# Altium PCB F407Z.PcbDoc (part 2 of 3)
Units mil, origin at the board's own origin, x right, y up, seen from the top; angles counter-clockwise.
Board outline 4724.41 x 3937.01 mil, 2 copper layers (Top Layer, Bottom Layer), stack 61.855 mil thick; 103 components, 137 nets, 547 pads, 2347 vias.
Unrouted connection lines stored in the file: 2.
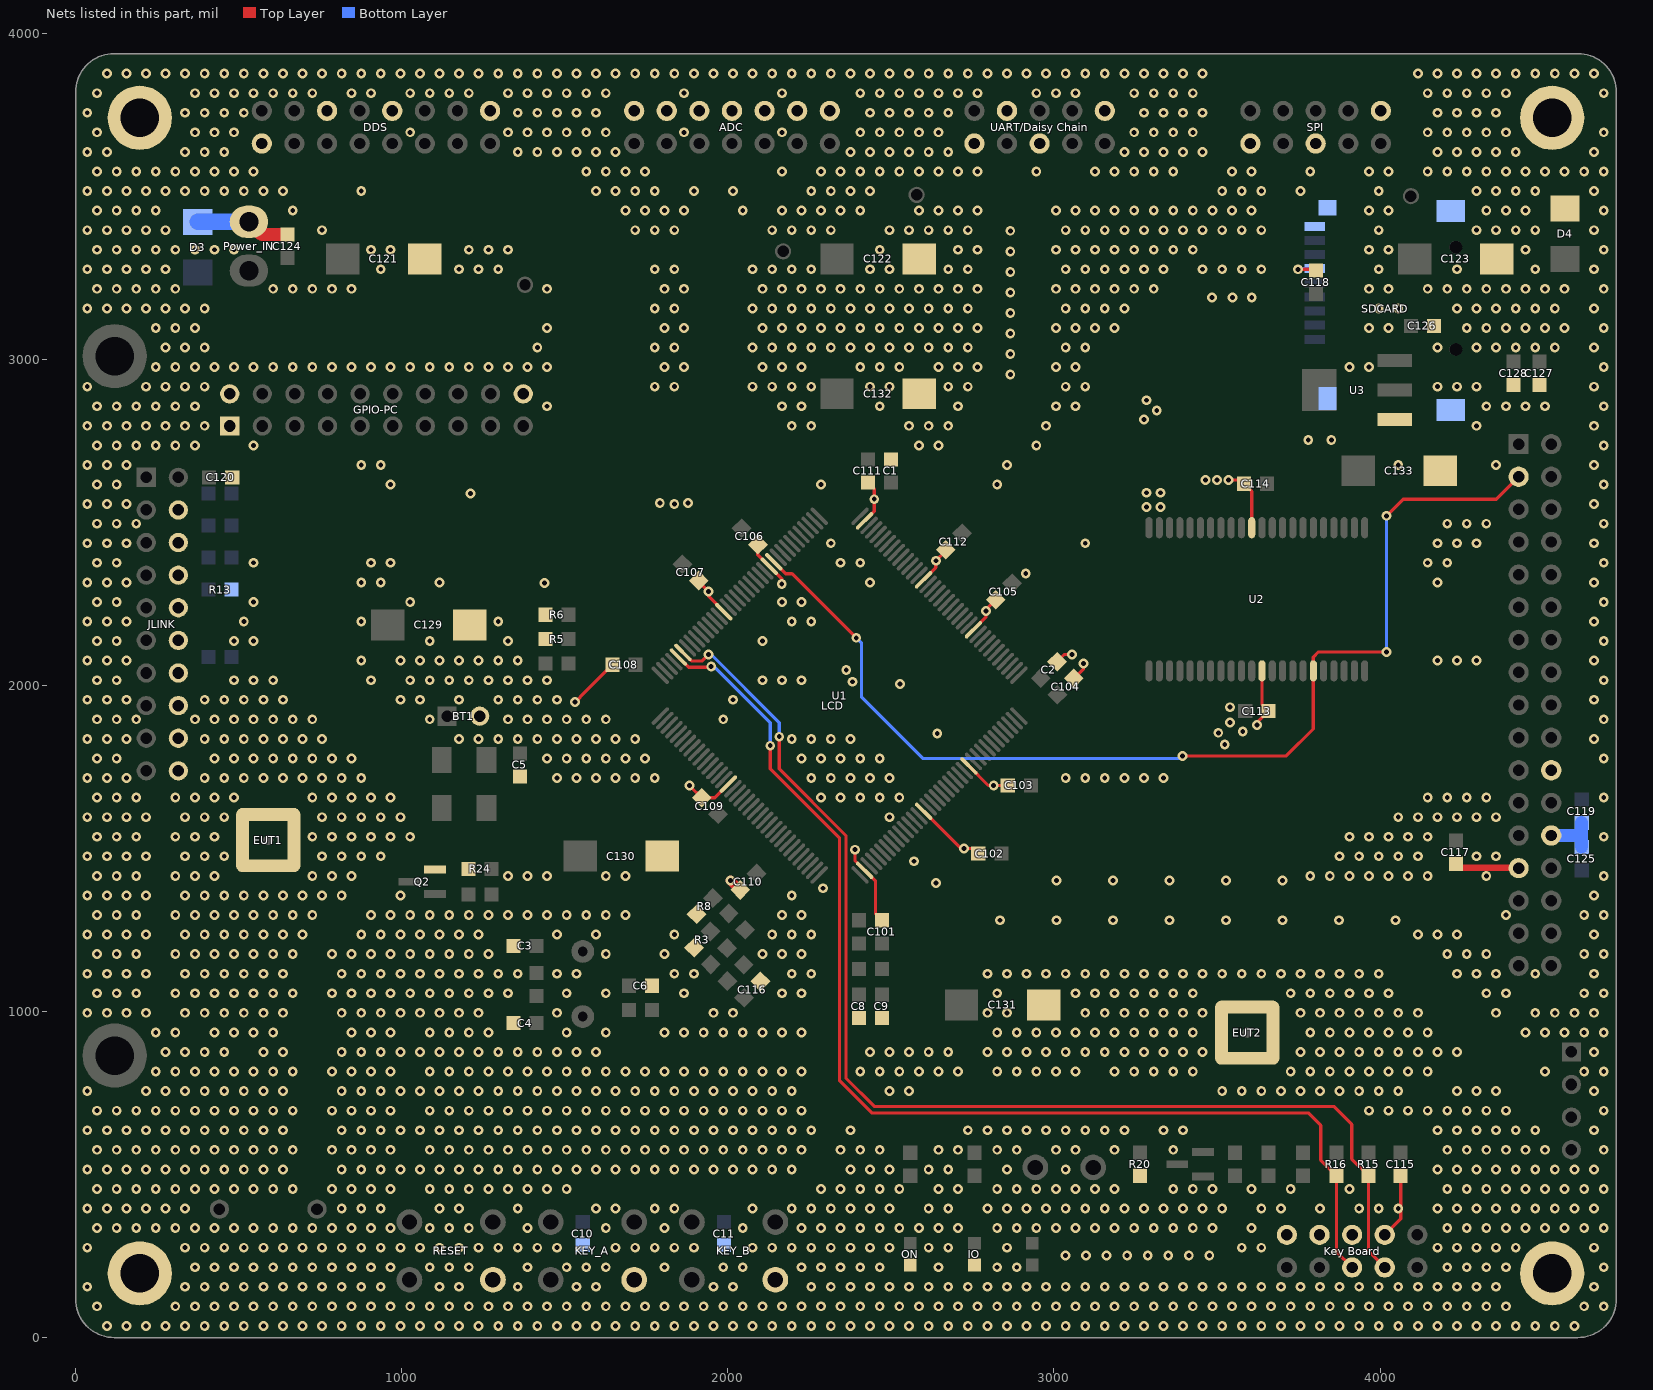
[diagram p2: the nets of this part, all layers, seen from the top]

## Via types
v1: diameter 30, hole 15, Top Layer to Bottom Layer, tented both sides, 2344 vias
v2: diameter 30, hole 15, Top Layer to Bottom Layer, 3 vias

## Nets (pads, with @x,y where several pads share a name; then routed paths per layer and width w, separated by ;. In a path a pad name is that pad's centre, name@x,y a point inside that pad or via, vN(x,y) a via of type N, cw(c..) or ccw(c..) an arc to the next point about the centre after c; other vN are vias at no path point) (continued)
FSMC_NWE: LCD.3 U1.119 U2.17 | length 3352.4
  Top Layer w10: U1.119@2140.69,2379.13 2177.3,2342.52 2196.85,2342.52 v1(2393.7,2145.67) ; v1(3393.7,1783.46) 3712.6,1783.46 3795.28,1866.14 3795.28,2023.62 U2.17@3799.21,2027.56 ; U2.17@3795.28,2044.29 3795.28,2086.61 3811.02,2102.36 v1(4019.69,2102.36) ; v1(4019.69,2519.68) 4070.87,2570.87 4355.94,2570.87 LCD.3@4424.69,2639.61
  Bottom Layer w10: v1(2393.7,2145.67) 2410,2129.37 2410,1963.02 2597.18,1775.84 3357.02,1775.84 3357.27,1775.59 3393.7,1775.59 v1(3393.7,1783.46) ; v1(4019.69,2102.36) v1(4019.69,2519.68)
GND: "Key Board.3" "Key Board.5" "Key Board.7" "Key Board.9" "UART/Daisy Chain.1" "UART/Daisy Chain.4" "UART/Daisy Chain.5" "UART/Daisy Chain.10" ADC.2 ADC.4 ADC.6 ADC.8 ADC.10 ADC.12 ADC.14 BT1.2 C1.1 C2.1 C3.2 C4.2 C5.2 C6.2 C8.1 C9.1 C10.2 C11.2 C101.1 C102.1 C103.1 C104.1 C105.1 C106.1 C107.1 C108.1 C109.1 C110.1 C111.1 C112.1 C113.1 C114.1 C115.1 C116.1 C117.1 C118.1 C119.1 C120.1 C121.2 C122.2 C123.2 C124.1 C125.1 C126.1 C127.1 C128.1 C129.2 C130.2 C131.2 C132.2 C133.2 D3.1 D4.1 DDS.1 DDS.6 DDS.10 DDS.16 EUT1.2 EUT2.2 GPIO-PC.1 GPIO-PC.2 GPIO-PC.20 IO.2 JLINK.4 JLINK.6 JLINK.8 JLINK.10 JLINK.12 JLINK.14 JLINK.16 JLINK.18 JLINK.20 KEY_A.2 KEY_B.2 LCD.22 LCD.26 LCD.27 ON.2 pad.0 pad.1 pad.2 pad.3 Power_IN.2 Q2.2 R3.1 R5.1 R6.2 R8.2 R13.1 R20.1 R24.1 RESET.2 SDCARD.6 SDCARD.9 SDCARD.10 SDCARD.11 SDCARD.12 SDCARD.13 SPI.1 SPI.5 SPI.10 U1.16 U1.38 U1.51 U1.61 U1.83 U1.94 U1.107 U1.120 U1.130 U2.12 U2.34 U3.1 | length 3082.3
  Top Layer w10: v1(1531.5,1948.82) 1562.99,1980.31 C108.1@1645.67,2062.99 ; v1(1881.89,1692.91) C109.1@1919.83,1654.98 1959.39,1654.98 U1.16@2001.49,1697.08 ; C107.1@1910.88,2321.4 1910.88,2317.46 v1(1940.94,2287.4) 1940.94,2272.64 U1.130@1987.57,2226.01 ; C106.1@2091.98,2431.64 2091.98,2399.99 U1.120@2126.77,2365.21 2165.35,2326.62 v1(2165.35,2311.02) ; v1(2389.76,1496.06) 2389.76,1461.92 U1.38@2419.08,1432.61 2452.76,1398.93 2452.76,1299.21 C101.1@2472.44,1279.53 ; U1.107@2419.08,2504.4 2448.82,2534.14 2448.82,2602.36 C111.1@2429.13,2622.05 ; U1.51@2600.03,1613.56 2713.59,1500 v1(2724.41,1500) 2751.97,1500 C102.1@2767.72,1484.25 ; U1.94@2600.03,2323.45 2637.8,2361.22 v1(2637.8,2381.89) 2667.86,2411.95 C112.1@2667.86,2415.89 ; U1.61@2739.22,1752.75 2799.06,1692.91 v1(2814.96,1692.91) C103.1@2858.27,1692.91 ; U1.83@2753.14,2170.34 2791.34,2208.53 v1(2791.34,2228.35) 2791.34,2232.28 C105.1@2821.4,2262.35 ; C2.1@3009.31,2072.3 3031.5,2094.49 v1(3055.12,2094.49) ; C104.1@3060.49,2021.12 3090.55,2051.18 v1(3090.55,2066.93) ; v1(3535.43,2629.92) 3570.87,2629.92 C114.1@3582.68,2618.11 3606.3,2594.49 U2.34@3606.3,2483.27 ; v1(3622.05,1877.95) 3622.05,1885.83 C113.1@3657.48,1921.26 3637.8,1940.94 U2.12@3637.8,2044.29 ; v1(3748.03,3275.59) 3795.28,3275.59 C118.1@3803.15,3267.72 ; 4014.17,314.96 4062.99,363.78 C115.1@4062.99,496.06 ; C117.1@4248.03,1448.82 4255.91,1440.94
  Top Layer w20: 4255.91,1440.94 4423.35,1440.94 LCD.27@4424.69,1439.61
  Top Layer w30: v1(2007.87,1401.57) 2036.87,1372.58 C110.1@2037.94,1372.58
  Top Layer w40: Power_IN.2@531.5,3421.46 571.06,3381.89 C124.1@649.61,3381.89
  Bottom Layer w10: v1(3748.03,3275.59) 3751.97,3275.59 3753.94,3277.56 SDCARD.6@3798.9,3277.56
  Bottom Layer w40: LCD.26@4524.69,1539.61 4613.94,1539.61 4618.11,1535.43 ; C125.1@4618.11,1503.94 4618.11,1535.43 ; C119.1@4618.11,1578.74 4618.11,1535.43
  Bottom Layer w50: D3.1@374.02,3421.26 531.3,3421.26 Power_IN.2@531.5,3421.46
  other v1: 95.75,35.75 155.75,35.75 215.75,35.75 275.75,35.75 335.75,35.75 395.75,35.75 455.75,35.75 515.75,35.75 575.75,35.75 635.75,35.75 695.75,35.75 755.75,35.75 815.75,35.75 875.75,35.75 935.75,35.75 995.75,35.75 1055.75,35.75 1115.75,35.75 1175.75,35.75 1235.75,35.75 1295.75,35.75 1355.75,35.75 1415.75,35.75 1475.75,35.75 1535.75,35.75 1595.75,35.75 1655.75,35.75 1715.75,35.75 1775.75,35.75 1835.75,35.75 1895.75,35.75 1955.75,35.75 2015.75,35.75 2075.75,35.75 2135.75,35.75 2195.75,35.75 2255.75,35.75 2315.75,35.75 2375.75,35.75 2435.75,35.75 2495.75,35.75 2555.75,35.75 2615.75,35.75 2675.75,35.75 2735.75,35.75 2795.75,35.75 2855.75,35.75 2915.75,35.75 2975.75,35.75 3035.75,35.75 3095.75,35.75 3155.75,35.75 3215.75,35.75 3275.75,35.75 3335.75,35.75 3395.75,35.75 3455.75,35.75 3515.75,35.75 3575.75,35.75 3635.75,35.75 3695.75,35.75 3755.75,35.75 3815.75,35.75 3875.75,35.75 3935.75,35.75 3995.75,35.75 4055.75,35.75 4115.75,35.75 4175.75,35.75 4235.75,35.75 4295.75,35.75 4355.75,35.75 4415.75,35.75 4475.75,35.75 4535.75,35.75 4595.75,35.75 65.75,95.75 305.75,95.75 365.75,95.75 425.75,95.75 485.75,95.75 545.75,95.75 605.75,95.75 665.75,95.75 725.75,95.75 785.75,95.75 845.75,95.75 905.75,95.75 965.75,95.75 1025.75,95.75 1085.75,95.75 1145.75,95.75 1205.75,95.75 1265.75,95.75 1325.75,95.75 1385.75,95.75 1445.75,95.75 1505.75,95.75 1565.75,95.75 1625.75,95.75 1685.75,95.75 1745.75,95.75 1805.75,95.75 1865.75,95.75 1925.75,95.75 1985.75,95.75 2045.75,95.75 2105.75,95.75 2165.75,95.75 2225.75,95.75 2285.75,95.75 2345.75,95.75 2405.75,95.75 2465.75,95.75 2525.75,95.75 2585.75,95.75 2645.75,95.75 2705.75,95.75 2765.75,95.75 2825.75,95.75 2885.75,95.75 2945.75,95.75 3005.75,95.75 3065.75,95.75 3125.75,95.75 3185.75,95.75 3245.75,95.75 3305.75,95.75 3365.75,95.75 3425.75,95.75 3485.75,95.75 3545.75,95.75 3605.75,95.75 3665.75,95.75 3725.75,95.75 3785.75,95.75 3845.75,95.75 3905.75,95.75 3965.75,95.75 4025.75,95.75 4085.75,95.75 4145.75,95.75 4205.75,95.75 4265.75,95.75 4325.75,95.75 4385.75,95.75 4625.75,95.75 4685.75,95.75 35.75,155.75 335.75,155.75 395.75,155.75 455.75,155.75 515.75,155.75 575.75,155.75 635.75,155.75 695.75,155.75 755.75,155.75 815.75,155.75 875.75,155.75 935.75,155.75 1115.75,155.75 1175.75,155.75 1355.75,155.75 1535.75,155.75 1595.75,155.75 1955.75,155.75 2015.75,155.75 2255.75,155.75 2315.75,155.75 2375.75,155.75 2435.75,155.75 2495.75,155.75 2555.75,155.75 2615.75,155.75 2675.75,155.75 2735.75,155.75 2795.75,155.75 2855.75,155.75 2915.75,155.75 2975.75,155.75 3035.75,155.75 3095.75,155.75 3155.75,155.75 3215.75,155.75 3275.75,155.75 3335.75,155.75 3395.75,155.75 3455.75,155.75 3515.75,155.75 3575.75,155.75 3635.75,155.75 3695.75,155.75 3755.75,155.75 3815.75,155.75 3875.75,155.75 3935.75,155.75 3995.75,155.75 4055.75,155.75 4115.75,155.75 4175.75,155.75 4235.75,155.75 4295.75,155.75 4355.75,155.75 4655.75,155.75 365.75,215.75 425.75,215.75 485.75,215.75 545.75,215.75 605.75,215.75 665.75,215.75 725.75,215.75 785.75,215.75 845.75,215.75 905.75,215.75 965.75,215.75 1085.75,215.75 1145.75,215.75 1205.75,215.75 1385.75,215.75 1505.75,215.75 1565.75,215.75 1625.75,215.75 1805.75,215.75 1985.75,215.75 2045.75,215.75 2225.75,215.75 2285.75,215.75 2345.75,215.75 2405.75,215.75 2465.75,215.75 2645.75,215.75 2825.75,215.75 2885.75,215.75 4205.75,215.75 4265.75,215.75 4325.75,215.75 4385.75,215.75 4685.75,215.75 3035.43,251.97 3098.43,251.97 3161.42,251.97 3224.41,251.97 3287.4,251.97 3350.39,251.97 3413.39,251.97 3476.38,251.97 35.75,275.75 335.75,275.75 395.75,275.75 455.75,275.75 515.75,275.75 575.75,275.75 635.75,275.75 695.75,275.75 755.75,275.75 815.75,275.75 875.75,275.75 935.75,275.75 995.75,275.75 1055.75,275.75 1115.75,275.75 1175.75,275.75 1235.75,275.75 1295.75,275.75 1355.75,275.75 1415.75,275.75 1475.75,275.75 1655.75,275.75 1715.75,275.75 1775.75,275.75 1835.75,275.75 1895.75,275.75 2075.75,275.75 2135.75,275.75 2195.75,275.75 2255.75,275.75 2315.75,275.75 2375.75,275.75 2435.75,275.75 2495.75,275.75 2615.75,275.75 2675.75,275.75 2855.75,275.75 3575.75,275.75 3635.75,275.75 4175.75,275.75 4235.75,275.75 4295.75,275.75 4355.75,275.75 4415.75,275.75 4655.75,275.75 65.75,335.75 125.75,335.75 185.75,335.75 245.75,335.75 305.75,335.75 365.75,335.75 425.75,335.75 485.75,335.75 545.75,335.75 605.75,335.75 665.75,335.75 725.75,335.75 785.75,335.75 845.75,335.75 905.75,335.75 965.75,335.75 1085.75,335.75 1145.75,335.75 1205.75,335.75 1385.75,335.75 1625.75,335.75 1805.75,335.75 2045.75,335.75 2225.75,335.75 2285.75,335.75 2345.75,335.75 2405.75,335.75 2465.75,335.75 2525.75,335.75 2585.75,335.75 2645.75,335.75 2705.75,335.75 2825.75,335.75 2885.75,335.75 2945.75,335.75 3005.75,335.75 3065.75,335.75 3125.75,335.75 3185.75,335.75 3245.75,335.75 3305.75,335.75 3365.75,335.75 3425.75,335.75 3485.75,335.75 3605.75,335.75 4205.75,335.75 4265.75,335.75 4325.75,335.75 4385.75,335.75 4445.75,335.75 4505.75,335.75 4565.75,335.75 4625.75,335.75 4685.75,335.75 35.75,395.75 95.75,395.75 155.75,395.75 215.75,395.75 275.75,395.75 335.75,395.75 815.75,395.75 875.75,395.75 935.75,395.75 1115.75,395.75 1175.75,395.75 1355.75,395.75 1595.75,395.75 1655.75,395.75 1775.75,395.75 1835.75,395.75 2075.75,395.75 2195.75,395.75 2255.75,395.75 2315.75,395.75 2375.75,395.75 2435.75,395.75 2495.75,395.75 2615.75,395.75 2675.75,395.75 2795.75,395.75 2855.75,395.75 2915.75,395.75 2975.75,395.75 3035.75,395.75 3095.75,395.75 3155.75,395.75 3215.75,395.75 3275.75,395.75 3335.75,395.75 3395.75,395.75 3455.75,395.75 3515.75,395.75 3635.75,395.75 3695.75,395.75 3815.75,395.75 3935.75,395.75 3995.75,395.75 4055.75,395.75 4175.75,395.75 4235.75,395.75 4295.75,395.75 4355.75,395.75 4415.75,395.75 4475.75,395.75 4535.75,395.75 4595.75,395.75 4655.75,395.75 65.75,455.75 125.75,455.75 185.75,455.75 245.75,455.75 305.75,455.75 365.75,455.75 425.75,455.75 485.75,455.75 545.75,455.75 605.75,455.75 665.75,455.75 785.75,455.75 845.75,455.75 905.75,455.75 965.75,455.75 1085.75,455.75 1145.75,455.75 1205.75,455.75 1265.75,455.75 1325.75,455.75 1385.75,455.75 1445.75,455.75 1505.75,455.75 2285.75,455.75 2345.75,455.75 2405.75,455.75 2465.75,455.75 2525.75,455.75 2645.75,455.75 2705.75,455.75 2825.75,455.75 2885.75,455.75 2945.75,455.75 3005.75,455.75 3065.75,455.75 3125.75,455.75 3185.75,455.75 3365.75,455.75 3425.75,455.75 3485.75,455.75 3605.75,455.75 3725.75,455.75 3905.75,455.75 4205.75,455.75 4265.75,455.75 4325.75,455.75 4385.75,455.75 4445.75,455.75 4505.75,455.75 4565.75,455.75 4625.75,455.75 4685.75,455.75 35.75,515.75 95.75,515.75 155.75,515.75 215.75,515.75 275.75,515.75 335.75,515.75 395.75,515.75 455.75,515.75 515.75,515.75 575.75,515.75 635.75,515.75 815.75,515.75 875.75,515.75 935.75,515.75 995.75,515.75 1055.75,515.75 1115.75,515.75 1175.75,515.75 1235.75,515.75 1295.75,515.75 1355.75,515.75 1415.75,515.75 1475.75,515.75 1535.75,515.75 1595.75,515.75 1655.75,515.75 1715.75,515.75 1775.75,515.75 1835.75,515.75 1895.75,515.75 1955.75,515.75 2015.75,515.75 2075.75,515.75 2135.75,515.75 2195.75,515.75 2375.75,515.75 2435.75,515.75 2495.75,515.75 2615.75,515.75 2675.75,515.75 2855.75,515.75 3035.75,515.75 4175.75,515.75 4235.75,515.75 4295.75,515.75 4355.75,515.75 4415.75,515.75 4475.75,515.75 4535.75,515.75 4595.75,515.75 4655.75,515.75 65.75,575.75 125.75,575.75 185.75,575.75 245.75,575.75 305.75,575.75 365.75,575.75 425.75,575.75 485.75,575.75 545.75,575.75 605.75,575.75 665.75,575.75 785.75,575.75 845.75,575.75 905.75,575.75 965.75,575.75 1085.75,575.75 1145.75,575.75 1205.75,575.75 1265.75,575.75 1325.75,575.75 1385.75,575.75 1445.75,575.75 1505.75,575.75 1565.75,575.75 1625.75,575.75 1685.75,575.75 1745.75,575.75 1805.75,575.75 1865.75,575.75 1925.75,575.75 1985.75,575.75 2045.75,575.75 2105.75,575.75 2165.75,575.75 2225.75,575.75 2345.75,575.75 2405.75,575.75 2465.75,575.75 2645.75,575.75 2705.75,575.75 2825.75,575.75 2885.75,575.75 3005.75,575.75 3065.75,575.75 3185.75,575.75 3365.75,575.75 4205.75,575.75 4265.75,575.75 4325.75,575.75 4385.75,575.75 4445.75,575.75 4505.75,575.75 4685.75,575.75 35.75,635.75 95.75,635.75 155.75,635.75 215.75,635.75 275.75,635.75 335.75,635.75 395.75,635.75 455.75,635.75 515.75,635.75 575.75,635.75 635.75,635.75 815.75,635.75 875.75,635.75 935.75,635.75 995.75,635.75 1055.75,635.75 1115.75,635.75 1175.75,635.75 1235.75,635.75 1295.75,635.75 1355.75,635.75 1415.75,635.75 1475.75,635.75 1535.75,635.75 1595.75,635.75 1655.75,635.75 1715.75,635.75 1775.75,635.75 1835.75,635.75 1895.75,635.75 1955.75,635.75 2015.75,635.75 2075.75,635.75 2135.75,635.75 2195.75,635.75 2255.75,635.75 2375.75,635.75 2735.75,635.75 2795.75,635.75 2855.75,635.75 2915.75,635.75 2975.75,635.75 3035.75,635.75 3095.75,635.75 3155.75,635.75 3215.75,635.75 3335.75,635.75 3395.75,635.75 4175.75,635.75 4235.75,635.75 4295.75,635.75 4355.75,635.75 4415.75,635.75 4475.75,635.75 4655.75,635.75 65.75,695.75 125.75,695.75 185.75,695.75 245.75,695.75 305.75,695.75 365.75,695.75 425.75,695.75 485.75,695.75 545.75,695.75 605.75,695.75 665.75,695.75 785.75,695.75 845.75,695.75 905.75,695.75 965.75,695.75 1085.75,695.75 1145.75,695.75 1205.75,695.75 1265.75,695.75 1325.75,695.75 1385.75,695.75 1445.75,695.75 1505.75,695.75 1565.75,695.75 1625.75,695.75 1685.75,695.75 1745.75,695.75 1805.75,695.75 1865.75,695.75 1925.75,695.75 1985.75,695.75 2045.75,695.75 2105.75,695.75 2165.75,695.75 2225.75,695.75 3965.75,695.75 4025.75,695.75 4085.75,695.75 4145.75,695.75 4205.75,695.75 4265.75,695.75 4325.75,695.75 4385.75,695.75 4685.75,695.75 35.75,755.75 215.75,755.75 275.75,755.75 335.75,755.75 395.75,755.75 455.75,755.75 515.75,755.75 575.75,755.75 635.75,755.75 815.75,755.75 875.75,755.75 935.75,755.75 995.75,755.75 1055.75,755.75 1115.75,755.75 1175.75,755.75 1235.75,755.75 1295.75,755.75 1355.75,755.75 1415.75,755.75 1475.75,755.75 1535.75,755.75 1595.75,755.75 1655.75,755.75 1715.75,755.75 1775.75,755.75 1835.75,755.75 1895.75,755.75 1955.75,755.75 2015.75,755.75 2075.75,755.75 2135.75,755.75 2195.75,755.75 2495.75,755.75 2555.75,755.75 3515.75,755.75 3575.75,755.75 3635.75,755.75 3695.75,755.75 3755.75,755.75 3815.75,755.75 3875.75,755.75 3935.75,755.75 3995.75,755.75 4055.75,755.75 4235.75,755.75 4295.75,755.75 4355.75,755.75 4655.75,755.75 245.75,815.75 305.75,815.75 365.75,815.75 425.75,815.75 485.75,815.75 545.75,815.75 605.75,815.75 665.75,815.75 785.75,815.75 845.75,815.75 905.75,815.75 965.75,815.75 1085.75,815.75 1145.75,815.75 1205.75,815.75 1265.75,815.75 1325.75,815.75 1385.75,815.75 1445.75,815.75 1505.75,815.75 1565.75,815.75 1625.75,815.75 1685.75,815.75 1745.75,815.75 1805.75,815.75 1865.75,815.75 1925.75,815.75 1985.75,815.75 2045.75,815.75 2105.75,815.75 2165.75,815.75 2225.75,815.75 2405.75,815.75 2465.75,815.75 2525.75,815.75 2585.75,815.75 2645.75,815.75 2705.75,815.75 2825.75,815.75 2885.75,815.75 2945.75,815.75 3005.75,815.75 3065.75,815.75 3185.75,815.75 3245.75,815.75 3305.75,815.75 3365.75,815.75 3425.75,815.75 3725.75,815.75 3785.75,815.75 3845.75,815.75 3905.75,815.75 3965.75,815.75 4025.75,815.75 4085.75,815.75 4145.75,815.75 4505.75,815.75 4625.75,815.75 4685.75,815.75 275.75,875.75 335.75,875.75 395.75,875.75 455.75,875.75 575.75,875.75 635.75,875.75 815.75,875.75 875.75,875.75 935.75,875.75 995.75,875.75 1055.75,875.75 1115.75,875.75 1175.75,875.75 1235.75,875.75 1295.75,875.75 1355.75,875.75 1415.75,875.75 1475.75,875.75 1535.75,875.75 1595.75,875.75 2435.75,875.75 2495.75,875.75 2555.75,875.75 2615.75,875.75 2675.75,875.75 2795.75,875.75 2855.75,875.75 2915.75,875.75 2975.75,875.75 3035.75,875.75 3095.75,875.75 3155.75,875.75 3215.75,875.75 3275.75,875.75 3335.75,875.75 3395.75,875.75 3455.75,875.75 3755.75,875.75 3815.75,875.75 3875.75,875.75 3935.75,875.75 3995.75,875.75 4055.75,875.75 4115.75,875.75 4175.75,875.75 4235.75,875.75 4655.75,875.75 245.75,935.75 305.75,935.75 425.75,935.75 485.75,935.75 545.75,935.75 605.75,935.75 845.75,935.75 905.75,935.75 965.75,935.75 1085.75,935.75 1145.75,935.75 1205.75,935.75 1265.75,935.75 1505.75,935.75 1625.75,935.75 1805.75,935.75 1865.75,935.75 1925.75,935.75 1985.75,935.75 2045.75,935.75 2105.75,935.75 2165.75,935.75 2225.75,935.75 2825.75,935.75 2885.75,935.75 2945.75,935.75 3005.75,935.75 3065.75,935.75 3125.75,935.75 3185.75,935.75 3245.75,935.75 3305.75,935.75 3365.75,935.75 3425.75,935.75 3785.75,935.75 3845.75,935.75 3905.75,935.75 3965.75,935.75 4025.75,935.75 4085.75,935.75 4145.75,935.75 4445.75,935.75 4505.75,935.75 4565.75,935.75 4625.75,935.75 4685.75,935.75 35.75,995.75 95.75,995.75 155.75,995.75 215.75,995.75 335.75,995.75 395.75,995.75 455.75,995.75 515.75,995.75 575.75,995.75 635.75,995.75 815.75,995.75 875.75,995.75 935.75,995.75 995.75,995.75 1055.75,995.75 1115.75,995.75 1175.75,995.75 1235.75,995.75 1475.75,995.75 1955.75,995.75 2015.75,995.75 2795.75,995.75 2855.75,995.75 3095.75,995.75 3155.75,995.75 3215.75,995.75 3275.75,995.75 3335.75,995.75 3395.75,995.75 3455.75,995.75 3755.75,995.75 3815.75,995.75 3875.75,995.75 3935.75,995.75 3995.75,995.75 4055.75,995.75 4115.75,995.75 4355.75,995.75 4475.75,995.75 4535.75,995.75 4595.75,995.75 4655.75,995.75 65.75,1055.75 125.75,1055.75 185.75,1055.75 305.75,1055.75 365.75,1055.75 425.75,1055.75 485.75,1055.75 545.75,1055.75 605.75,1055.75 665.75,1055.75 785.75,1055.75 845.75,1055.75 905.75,1055.75 965.75,1055.75 1025.75,1055.75 1085.75,1055.75 1145.75,1055.75 1205.75,1055.75 1265.75,1055.75 1325.75,1055.75 1505.75,1055.75 1625.75,1055.75 1865.75,1055.75 2165.75,1055.75 2225.75,1055.75 2825.75,1055.75 3065.75,1055.75 3125.75,1055.75 3185.75,1055.75 3245.75,1055.75 3305.75,1055.75 3365.75,1055.75 3425.75,1055.75 3725.75,1055.75 3785.75,1055.75 3845.75,1055.75 3905.75,1055.75 3965.75,1055.75 4025.75,1055.75 4325.75,1055.75 4385.75,1055.75 4625.75,1055.75 4685.75,1055.75 35.75,1115.75 95.75,1115.75 155.75,1115.75 215.75,1115.75 335.75,1115.75 395.75,1115.75 455.75,1115.75 515.75,1115.75 575.75,1115.75 635.75,1115.75 815.75,1115.75 875.75,1115.75 935.75,1115.75 995.75,1115.75 1055.75,1115.75 1115.75,1115.75 1175.75,1115.75 1235.75,1115.75 1295.75,1115.75 1355.75,1115.75 1475.75,1115.75 1535.75,1115.75 1835.75,1115.75 1895.75,1115.75 2195.75,1115.75 2255.75,1115.75 2795.75,1115.75 2855.75,1115.75 2915.75,1115.75 2975.75,1115.75 3035.75,1115.75 3095.75,1115.75 3155.75,1115.75 3215.75,1115.75 3275.75,1115.75 3335.75,1115.75 3395.75,1115.75 3455.75,1115.75 3515.75,1115.75 3575.75,1115.75 3635.75,1115.75 3695.75,1115.75 3755.75,1115.75 3815.75,1115.75 3875.75,1115.75 3935.75,1115.75 3995.75,1115.75 4235.75,1115.75 4295.75,1115.75 4355.75,1115.75 4475.75,1115.75 4655.75,1115.75 65.75,1175.75 125.75,1175.75 185.75,1175.75 305.75,1175.75 365.75,1175.75 425.75,1175.75 485.75,1175.75 545.75,1175.75 605.75,1175.75 665.75,1175.75 785.75,1175.75 845.75,1175.75 905.75,1175.75 965.75,1175.75 1025.75,1175.75 1085.75,1175.75 1145.75,1175.75 1205.75,1175.75 1265.75,1175.75 1625.75,1175.75 1805.75,1175.75 2105.75,1175.75 2165.75,1175.75 2225.75,1175.75 4205.75,1175.75 4265.75,1175.75 4325.75,1175.75 4625.75,1175.75 4685.75,1175.75 35.75,1235.75 95.75,1235.75 155.75,1235.75 215.75,1235.75 335.75,1235.75 395.75,1235.75 455.75,1235.75 515.75,1235.75 575.75,1235.75 635.75,1235.75 695.75,1235.75 875.75,1235.75 935.75,1235.75 995.75,1235.75 1055.75,1235.75 1115.75,1235.75 1175.75,1235.75 1235.75,1235.75 1475.75,1235.75 1595.75,1235.75 1835.75,1235.75 2135.75,1235.75 2195.75,1235.75 2255.75,1235.75 4115.75,1235.75 4175.75,1235.75 4235.75,1235.75 4655.75,1235.75 2834.65,1279.53 3007.87,1279.53 3181.1,1279.53 3354.33,1279.53 3527.56,1279.53 3700.79,1279.53 3874.02,1279.53 4047.24,1279.53 65.75,1295.75 125.75,1295.75 185.75,1295.75 305.75,1295.75 365.75,1295.75 425.75,1295.75 485.75,1295.75 545.75,1295.75 605.75,1295.75 665.75,1295.75 725.75,1295.75 905.75,1295.75 965.75,1295.75 1025.75,1295.75 1085.75,1295.75 1145.75,1295.75 1205.75,1295.75 1265.75,1295.75 1325.75,1295.75 1385.75,1295.75 1445.75,1295.75 1505.75,1295.75 1565.75,1295.75 1625.75,1295.75 1685.75,1295.75 2165.75,1295.75 2225.75,1295.75 4385.75,1295.75 4625.75,1295.75 4685.75,1295.75 35.75,1355.75 95.75,1355.75 155.75,1355.75 215.75,1355.75 335.75,1355.75 395.75,1355.75 455.75,1355.75 515.75,1355.75 575.75,1355.75 635.75,1355.75 695.75,1355.75 755.75,1355.75 815.75,1355.75 995.75,1355.75 2195.75,1355.75 4655.75,1355.75 2291.34,1377.95 2637.8,1393.7 3007.87,1401.57 3181.1,1401.57 3354.33,1401.57 3527.56,1401.57 3700.79,1401.57 65.75,1415.75 125.75,1415.75 185.75,1415.75 305.75,1415.75 365.75,1415.75 425.75,1415.75 725.75,1415.75 785.75,1415.75 845.75,1415.75 1325.75,1415.75 1385.75,1415.75 1445.75,1415.75 1625.75,1415.75 1685.75,1415.75 3785.75,1415.75 3845.75,1415.75 3905.75,1415.75 3965.75,1415.75 4025.75,1415.75 4085.75,1415.75 4145.75,1415.75 4325.75,1415.75 4685.75,1415.75 2570.87,1460.63 35.75,1475.75 95.75,1475.75 155.75,1475.75 215.75,1475.75 335.75,1475.75 395.75,1475.75 455.75,1475.75 755.75,1475.75 815.75,1475.75 875.75,1475.75 935.75,1475.75 3875.75,1475.75 3935.75,1475.75 3995.75,1475.75 4055.75,1475.75 4115.75,1475.75 4295.75,1475.75 4355.75,1475.75 65.75,1535.75 125.75,1535.75 185.75,1535.75 305.75,1535.75 365.75,1535.75 425.75,1535.75 725.75,1535.75 785.75,1535.75 845.75,1535.75 905.75,1535.75 965.75,1535.75 1025.75,1535.75 3905.75,1535.75 3965.75,1535.75 4025.75,1535.75 4085.75,1535.75 4145.75,1535.75 4685.75,1535.75 35.75,1595.75 95.75,1595.75 155.75,1595.75 215.75,1595.75 335.75,1595.75 395.75,1595.75 455.75,1595.75 755.75,1595.75 815.75,1595.75 875.75,1595.75 935.75,1595.75 995.75,1595.75 2495.75,1595.75 4055.75,1595.75 4115.75,1595.75 4175.75,1595.75 4235.75,1595.75 4295.75,1595.75 4355.75,1595.75 65.75,1655.75 125.75,1655.75 185.75,1655.75 305.75,1655.75 365.75,1655.75 425.75,1655.75 485.75,1655.75 725.75,1655.75 785.75,1655.75 845.75,1655.75 905.75,1655.75 965.75,1655.75 2285.75,1655.75 2345.75,1655.75 2405.75,1655.75 2465.75,1655.75 2525.75,1655.75 4145.75,1655.75 4205.75,1655.75 4265.75,1655.75 4325.75,1655.75 4685.75,1655.75 35.75,1715.75 95.75,1715.75 155.75,1715.75 395.75,1715.75 455.75,1715.75 515.75,1715.75 575.75,1715.75 635.75,1715.75 695.75,1715.75 755.75,1715.75 815.75,1715.75 875.75,1715.75 1475.75,1715.75 1535.75,1715.75 1595.75,1715.75 1655.75,1715.75 1715.75,1715.75 1775.75,1715.75 2255.75,1715.75 2315.75,1715.75 2375.75,1715.75 2435.75,1715.75 2495.75,1715.75 3035.75,1715.75 3095.75,1715.75 3155.75,1715.75 3215.75,1715.75 3275.75,1715.75 3335.75,1715.75 65.75,1775.75 125.75,1775.75 425.75,1775.75 485.75,1775.75 545.75,1775.75 605.75,1775.75 665.75,1775.75 725.75,1775.75 785.75,1775.75 845.75,1775.75 1445.75,1775.75 1505.75,1775.75 1565.75,1775.75 1625.75,1775.75 1685.75,1775.75 1745.75,1775.75 2225.75,1775.75 2285.75,1775.75 2345.75,1775.75 2405.75,1775.75 2465.75,1775.75 4685.75,1775.75 3523.62,1818.9 35.75,1835.75 95.75,1835.75 155.75,1835.75 395.75,1835.75 455.75,1835.75 515.75,1835.75 575.75,1835.75 635.75,1835.75 695.75,1835.75 755.75,1835.75 1175.75,1835.75 1235.75,1835.75 1295.75,1835.75 1355.75,1835.75 1415.75,1835.75 1475.75,1835.75 1535.75,1835.75 1595.75,1835.75 1655.75,1835.75 1715.75,1835.75 2195.75,1835.75 2255.75,1835.75 2315.75,1835.75 2375.75,1835.75 4655.75,1835.75 2642,1852 3503.94,1854.33 3578.74,1858.27 3539.37,1885.83 65.75,1895.75 125.75,1895.75 185.75,1895.75 365.75,1895.75 425.75,1895.75 485.75,1895.75 545.75,1895.75 605.75,1895.75 665.75,1895.75 725.75,1895.75 1085.75,1895.75 1325.75,1895.75 1385.75,1895.75 1445.75,1895.75 1505.75,1895.75 1565.75,1895.75 1625.75,1895.75 1985.75,1895.75 4685.75,1895.75 3539.37,1933.07 35.75,1955.75 95.75,1955.75 155.75,1955.75 395.75,1955.75 455.75,1955.75 515.75,1955.75 575.75,1955.75 635.75,1955.75 995.75,1955.75 1055.75,1955.75 1175.75,1955.75 1295.75,1955.75 1355.75,1955.75 1415.75,1955.75 1475.75,1955.75 2015.75,1955.75 4655.75,1955.75 2527.56,2003.94 2382,2011 65.75,2015.75 125.75,2015.75 485.75,2015.75 545.75,2015.75 605.75,2015.75 905.75,2015.75 1025.75,2015.75 1085.75,2015.75 1145.75,2015.75 1205.75,2015.75 1265.75,2015.75 1325.75,2015.75 1385.75,2015.75 1445.75,2015.75 2105.75,2015.75 2165.75,2015.75 2225.75,2015.75 4685.75,2015.75 2363,2047 35.75,2075.75 95.75,2075.75 155.75,2075.75 875.75,2075.75 995.75,2075.75 1055.75,2075.75 1115.75,2075.75 1175.75,2075.75 1235.75,2075.75 1295.75,2075.75 1355.75,2075.75 4175.75,2075.75 4235.75,2075.75 4295.75,2075.75 4655.75,2075.75 65.75,2135.75 125.75,2135.75 485.75,2135.75 545.75,2135.75 1085.75,2135.75 1325.75,2135.75 2105.75,2135.75 4685.75,2135.75 35.75,2195.75 95.75,2195.75 155.75,2195.75 515.75,2195.75 875.75,2195.75 1295.75,2195.75 2195.75,2195.75 2255.75,2195.75 4655.75,2195.75 65.75,2255.75 125.75,2255.75 545.75,2255.75 1025.75,2255.75 2165.75,2255.75 2225.75,2255.75 4685.75,2255.75 1438,2314 35.75,2315.75 95.75,2315.75 155.75,2315.75 875.75,2315.75 935.75,2315.75 1115.75,2315.75 2435.75,2315.75 4175.75,2315.75 4655.75,2315.75 2913.39,2342.52 65.75,2375.75 125.75,2375.75 545.75,2375.75 905.75,2375.75 965.75,2375.75 2345.75,2375.75 2405.75,2375.75 4145.75,2375.75 4205.75,2375.75 4685.75,2375.75 35.75,2435.75 95.75,2435.75 155.75,2435.75 2315.75,2435.75 3095.75,2435.75 4175.75,2435.75 4235.75,2435.75 4295.75,2435.75 4655.75,2435.75 65.75,2495.75 125.75,2495.75 185.75,2495.75 4205.75,2495.75 4265.75,2495.75 4325.75,2495.75 4685.75,2495.75 3283.46,2547.24 3326.77,2547.24 35.75,2555.75 95.75,2555.75 155.75,2555.75 1835.75,2555.75 4655.75,2555.75 1791.34,2559.06 1877.95,2559.06 2448.82,2570.87 1211,2588 3283.46,2590.55 3326.77,2590.55 65.75,2615.75 125.75,2615.75 965.75,2615.75 2285.75,2615.75 2825.75,2615.75 4685.75,2615.75 3464.57,2629.92 3500,2629.92 35.75,2675.75 95.75,2675.75 155.75,2675.75 875.75,2675.75 935.75,2675.75 2855.75,2675.75 4055.75,2675.75 4355.75,2675.75 4655.75,2675.75 65.75,2735.75 125.75,2735.75 185.75,2735.75 245.75,2735.75 305.75,2735.75 365.75,2735.75 545.75,2735.75 2585.75,2735.75 2645.75,2735.75 2945.75,2735.75 4685.75,2735.75 3779.53,2751.97 3850.39,2751.97 35.75,2795.75 95.75,2795.75 155.75,2795.75 215.75,2795.75 275.75,2795.75 335.75,2795.75 395.75,2795.75 2195.75,2795.75 2255.75,2795.75 2555.75,2795.75 2615.75,2795.75 2675.75,2795.75 2975.75,2795.75 4295.75,2795.75 4655.75,2795.75 3275.59,2814.96 3314.96,2842.52 65.75,2855.75 125.75,2855.75 185.75,2855.75 245.75,2855.75 305.75,2855.75 365.75,2855.75 1445.75,2855.75 2165.75,2855.75 2225.75,2855.75 2465.75,2855.75 2705.75,2855.75 3005.75,2855.75 3065.75,2855.75 4325.75,2855.75 4385.75,2855.75 4445.75,2855.75 4505.75,2855.75 4685.75,2855.75 3283.46,2874.02 35.75,2915.75 215.75,2915.75 275.75,2915.75 335.75,2915.75 395.75,2915.75 1775.75,2915.75 1835.75,2915.75 2075.75,2915.75 2135.75,2915.75 2195.75,2915.75 2255.75,2915.75 2435.75,2915.75 2495.75,2915.75 2675.75,2915.75 2735.75,2915.75 3035.75,2915.75 3095.75,2915.75 4175.75,2915.75 4235.75,2915.75 4295.75,2915.75 4655.75,2915.75 2866.14,2952.76 245.75,2975.75 305.75,2975.75 365.75,2975.75 425.75,2975.75 485.75,2975.75 545.75,2975.75 605.75,2975.75 665.75,2975.75 725.75,2975.75 785.75,2975.75 845.75,2975.75 905.75,2975.75 965.75,2975.75 1025.75,2975.75 1085.75,2975.75 1145.75,2975.75 1205.75,2975.75 1265.75,2975.75 1325.75,2975.75 1385.75,2975.75 1445.75,2975.75 1805.75,2975.75 1865.75,2975.75 2105.75,2975.75 2165.75,2975.75 2225.75,2975.75 2405.75,2975.75 2465.75,2975.75 2525.75,2975.75 2645.75,2975.75 2705.75,2975.75 2765.75,2975.75 3005.75,2975.75 3065.75,2975.75 3905.75,2975.75 3965.75,2975.75 4685.75,2975.75 2866.14,3015.75 275.75,3035.75 335.75,3035.75 395.75,3035.75 1415.75,3035.75 1775.75,3035.75 1835.75,3035.75 2075.75,3035.75 2135.75,3035.75 2195.75,3035.75 2255.75,3035.75 2315.75,3035.75 2375.75,3035.75 2435.75,3035.75 2495.75,3035.75 2555.75,3035.75 2615.75,3035.75 2675.75,3035.75 2735.75,3035.75 3035.75,3035.75 3095.75,3035.75 4175.75,3035.75 4295.75,3035.75 4355.75,3035.75 4415.75,3035.75 4475.75,3035.75 4535.75,3035.75 4655.75,3035.75 2866.14,3078.74 245.75,3095.75 305.75,3095.75 365.75,3095.75 1445.75,3095.75 1805.75,3095.75 1865.75,3095.75 2105.75,3095.75 2165.75,3095.75 2225.75,3095.75 2285.75,3095.75 2345.75,3095.75 2405.75,3095.75 2465.75,3095.75 2525.75,3095.75 2585.75,3095.75 2645.75,3095.75 2705.75,3095.75 2765.75,3095.75 3005.75,3095.75 3065.75,3095.75 3125.75,3095.75 3185.75,3095.75 3965.75,3095.75 4025.75,3095.75 4265.75,3095.75 4325.75,3095.75 4385.75,3095.75 4445.75,3095.75 4505.75,3095.75 4565.75,3095.75 4685.75,3095.75 2866.14,3141.73 35.75,3155.75 95.75,3155.75 155.75,3155.75 215.75,3155.75 275.75,3155.75 335.75,3155.75 395.75,3155.75 1775.75,3155.75 1835.75,3155.75 2075.75,3155.75 2135.75,3155.75 2195.75,3155.75 2255.75,3155.75 2315.75,3155.75 2375.75,3155.75 2435.75,3155.75 2495.75,3155.75 2555.75,3155.75 2615.75,3155.75 2675.75,3155.75 2735.75,3155.75 3035.75,3155.75 3095.75,3155.75 3155.75,3155.75 3215.75,3155.75 3995.75,3155.75 4055.75,3155.75 4235.75,3155.75 4295.75,3155.75 4355.75,3155.75 4415.75,3155.75 4475.75,3155.75 4535.75,3155.75 4655.75,3155.75 2866.14,3204.72 65.75,3215.75 125.75,3215.75 185.75,3215.75 245.75,3215.75 305.75,3215.75 605.75,3215.75 665.75,3215.75 725.75,3215.75 785.75,3215.75 845.75,3215.75 1445.75,3215.75 1805.75,3215.75 1865.75,3215.75 2105.75,3215.75 2165.75,3215.75 2225.75,3215.75 2285.75,3215.75 2345.75,3215.75 2405.75,3215.75 2465.75,3215.75 2525.75,3215.75 2585.75,3215.75 2645.75,3215.75 2705.75,3215.75 2765.75,3215.75 3005.75,3215.75 3065.75,3215.75 3125.75,3215.75 3185.75,3215.75 3245.75,3215.75 3305.75,3215.75 3965.75,3215.75 4025.75,3215.75 4145.75,3215.75 4205.75,3215.75 4265.75,3215.75 4325.75,3215.75 4385.75,3215.75 4445.75,3215.75 4505.75,3215.75 4565.75,3215.75 4685.75,3215.75 2866.14,3267.72 35.75,3275.75 95.75,3275.75 155.75,3275.75 215.75,3275.75 275.75,3275.75 935.75,3275.75 1175.75,3275.75 1235.75,3275.75 1295.75,3275.75 1775.75,3275.75 1835.75,3275.75 2075.75,3275.75 2135.75,3275.75 2195.75,3275.75 2255.75,3275.75 2435.75,3275.75 2495.75,3275.75 2675.75,3275.75 2735.75,3275.75 3035.75,3275.75 3095.75,3275.75 3155.75,3275.75 3215.75,3275.75 3275.75,3275.75 3335.75,3275.75 3455.75,3275.75 3515.75,3275.75 3575.75,3275.75 3635.75,3275.75 3995.75,3275.75 4235.75,3275.75 4475.75,3275.75 4655.75,3275.75 2866.14,3330.71 65.75,3335.75 125.75,3335.75 185.75,3335.75 245.75,3335.75 305.75,3335.75 365.75,3335.75 425.75,3335.75 485.75,3335.75 905.75,3335.75 965.75,3335.75 1205.75,3335.75 1265.75,3335.75 1325.75,3335.75 2465.75,3335.75 2705.75,3335.75 2765.75,3335.75 3005.75,3335.75 3065.75,3335.75 3125.75,3335.75 3185.75,3335.75 3245.75,3335.75 3305.75,3335.75 3365.75,3335.75 3425.75,3335.75 3965.75,3335.75 4025.75,3335.75 4445.75,3335.75 4685.75,3335.75 2866.14,3393.7 35.75,3395.75 95.75,3395.75 155.75,3395.75 215.75,3395.75 275.75,3395.75 755.75,3395.75 1715.75,3395.75 1775.75,3395.75 1835.75,3395.75 2135.75,3395.75 2195.75,3395.75 2255.75,3395.75 2315.75,3395.75 2495.75,3395.75 2555.75,3395.75 2615.75,3395.75 2675.75,3395.75 2735.75,3395.75 3035.75,3395.75 3095.75,3395.75 3155.75,3395.75 3215.75,3395.75 3275.75,3395.75 3335.75,3395.75 3395.75,3395.75 3455.75,3395.75 3515.75,3395.75 3575.75,3395.75 3635.75,3395.75 3995.75,3395.75 4295.75,3395.75 4355.75,3395.75 4415.75,3395.75 4475.75,3395.75 4655.75,3395.75 65.75,3455.75 125.75,3455.75 185.75,3455.75 245.75,3455.75 665.75,3455.75 1685.75,3455.75 1745.75,3455.75 1805.75,3455.75 1865.75,3455.75 2045.75,3455.75 2165.75,3455.75 2225.75,3455.75 2285.75,3455.75 2345.75,3455.75 2405.75,3455.75 2585.75,3455.75 2645.75,3455.75 2705.75,3455.75 2765.75,3455.75 3005.75,3455.75 3065.75,3455.75 3125.75,3455.75 3185.75,3455.75 3245.75,3455.75 3305.75,3455.75 3365.75,3455.75 3425.75,3455.75 3485.75,3455.75 3545.75,3455.75 3605.75,3455.75 3965.75,3455.75 4025.75,3455.75 4325.75,3455.75 4385.75,3455.75 4445.75,3455.75 4685.75,3455.75 35.75,3515.75 95.75,3515.75 155.75,3515.75 215.75,3515.75 275.75,3515.75 335.75,3515.75 395.75,3515.75 455.75,3515.75 515.75,3515.75 575.75,3515.75 635.75,3515.75 875.75,3515.75 1595.75,3515.75 1655.75,3515.75 1715.75,3515.75 1775.75,3515.75 1895.75,3515.75 2015.75,3515.75 2255.75,3515.75 2315.75,3515.75 2375.75,3515.75 2435.75,3515.75 3515.75,3515.75 3575.75,3515.75 3635.75,3515.75 3755.75,3515.75 3995.75,3515.75 4295.75,3515.75 4355.75,3515.75 4415.75,3515.75 4475.75,3515.75 4655.75,3515.75 65.75,3575.75 125.75,3575.75 185.75,3575.75 245.75,3575.75 305.75,3575.75 365.75,3575.75 425.75,3575.75 485.75,3575.75 545.75,3575.75 1565.75,3575.75 1625.75,3575.75 1685.75,3575.75 1745.75,3575.75 2165.75,3575.75 2285.75,3575.75 2345.75,3575.75 2405.75,3575.75 2465.75,3575.75 2525.75,3575.75 2585.75,3575.75 2645.75,3575.75 2705.75,3575.75 2765.75,3575.75 2945.75,3575.75 3125.75,3575.75 3185.75,3575.75 3245.75,3575.75 3305.75,3575.75 3365.75,3575.75 3545.75,3575.75 3605.75,3575.75 3785.75,3575.75 3965.75,3575.75 4025.75,3575.75 4145.75,3575.75 4205.75,3575.75 4265.75,3575.75 4325.75,3575.75 4385.75,3575.75 4445.75,3575.75 4505.75,3575.75 4565.75,3575.75 4625.75,3575.75 4685.75,3575.75 35.75,3635.75 95.75,3635.75 335.75,3635.75 395.75,3635.75 455.75,3635.75 1355.75,3635.75 1415.75,3635.75 1475.75,3635.75 1535.75,3635.75 1595.75,3635.75 1655.75,3635.75 2375.75,3635.75 2435.75,3635.75 2495.75,3635.75 2555.75,3635.75 2615.75,3635.75 2675.75,3635.75 3215.75,3635.75 3275.75,3635.75 3335.75,3635.75 3395.75,3635.75 3455.75,3635.75 4175.75,3635.75 4235.75,3635.75 4295.75,3635.75 4355.75,3635.75 4415.75,3635.75 4655.75,3635.75 65.75,3695.75 365.75,3695.75 425.75,3695.75 485.75,3695.75 1025.75,3695.75 1325.75,3695.75 1385.75,3695.75 1445.75,3695.75 1505.75,3695.75 1565.75,3695.75 1625.75,3695.75 1865.75,3695.75 2165.75,3695.75 2405.75,3695.75 2465.75,3695.75 2525.75,3695.75 2585.75,3695.75 2645.75,3695.75 3245.75,3695.75 3305.75,3695.75 3365.75,3695.75 3425.75,3695.75 4145.75,3695.75 4205.75,3695.75 4265.75,3695.75 4325.75,3695.75 4385.75,3695.75 4685.75,3695.75 35.75,3755.75 335.75,3755.75 395.75,3755.75 455.75,3755.75 515.75,3755.75 1355.75,3755.75 1415.75,3755.75 1475.75,3755.75 1535.75,3755.75 1595.75,3755.75 2435.75,3755.75 2495.75,3755.75 2555.75,3755.75 2615.75,3755.75 2675.75,3755.75 3275.75,3755.75 3335.75,3755.75 3395.75,3755.75 3455.75,3755.75 4175.75,3755.75 4235.75,3755.75 4295.75,3755.75 4355.75,3755.75 65.75,3815.75 365.75,3815.75 425.75,3815.75 485.75,3815.75 545.75,3815.75 605.75,3815.75 665.75,3815.75 725.75,3815.75 845.75,3815.75 905.75,3815.75 1025.75,3815.75 1085.75,3815.75 1145.75,3815.75 1205.75,3815.75 1325.75,3815.75 1385.75,3815.75 1445.75,3815.75 1505.75,3815.75 1565.75,3815.75 1625.75,3815.75 1865.75,3815.75 2165.75,3815.75 2405.75,3815.75 2465.75,3815.75 2525.75,3815.75 2585.75,3815.75 2645.75,3815.75 2705.75,3815.75 2765.75,3815.75 2945.75,3815.75 3005.75,3815.75 3065.75,3815.75 3245.75,3815.75 3305.75,3815.75 3365.75,3815.75 3425.75,3815.75 4145.75,3815.75 4205.75,3815.75 4265.75,3815.75 4325.75,3815.75 4385.75,3815.75 4685.75,3815.75 95.75,3875.75 155.75,3875.75 215.75,3875.75 275.75,3875.75 335.75,3875.75 395.75,3875.75 455.75,3875.75 515.75,3875.75 575.75,3875.75 635.75,3875.75 695.75,3875.75 755.75,3875.75 815.75,3875.75 875.75,3875.75 935.75,3875.75 995.75,3875.75 1055.75,3875.75 1115.75,3875.75 1175.75,3875.75 1235.75,3875.75 1295.75,3875.75 1355.75,3875.75 1415.75,3875.75 1475.75,3875.75 1535.75,3875.75 1595.75,3875.75 1655.75,3875.75 1715.75,3875.75 1775.75,3875.75 1835.75,3875.75 1895.75,3875.75 1955.75,3875.75 2015.75,3875.75 2075.75,3875.75 2135.75,3875.75 2195.75,3875.75 2255.75,3875.75 2315.75,3875.75 2375.75,3875.75 2435.75,3875.75 2495.75,3875.75 2555.75,3875.75 2615.75,3875.75 2675.75,3875.75 2735.75,3875.75 2795.75,3875.75 2855.75,3875.75 2915.75,3875.75 2975.75,3875.75 3035.75,3875.75 3095.75,3875.75 3155.75,3875.75 3215.75,3875.75 3275.75,3875.75 3335.75,3875.75 3395.75,3875.75 3455.75,3875.75 4115.75,3875.75 4175.75,3875.75 4235.75,3875.75 4295.75,3875.75 4355.75,3875.75 4415.75,3875.75 4475.75,3875.75 4535.75,3875.75 4595.75,3875.75 4655.75,3875.75
  other v2: 3484.25,3188.98 3547.24,3188.98 3606.3,3188.98
I2C_SCL: "Key Board.4" R15.1 U1.139 | length 3665.9
  Top Layer w10: U1.139@1862.3,2100.74 1888.23,2074.8 1921.26,2074.8 v1(1940.94,2094.49) ; v1(2157.48,1842.52) 2157.48,1744.09 2362.2,1539.37 2362.2,795.28 2448.82,708.66 3858.27,708.66 3913.39,653.54 3913.39,547.24 R15.1@3964.57,496.06 3964.57,264.57 4014.17,214.96
  Bottom Layer w10: v1(1940.94,2094.49) 1948.6,2094.49 2157.48,1885.6 v1(2157.48,1842.52)
I2C_SDA: "Key Board.6" R16.1 U1.140 | length 3565.5
  Top Layer w10: U1.140@1848.38,2086.82 1880.08,2055.12 1948.82,2055.12 v1(1948.82,2057.5) ; v1(2129.92,1814.96) 2129.92,1744.09 2342.52,1531.5 2342.52,787.4 2440.94,688.98 3779.53,688.98 3817.91,650.59 3817.91,544.29 R16.1@3866.14,496.06 ; R16.1@3858.27,496.06 3866.14,488.19 3866.14,262.99 3914.17,214.96
  Bottom Layer w10: v1(1948.82,2057.5) 1958.25,2057.5 2129.92,1885.83 v1(2129.92,1814.96)